# EAGLE board 1tm32 (EAGLE 9.6.2)
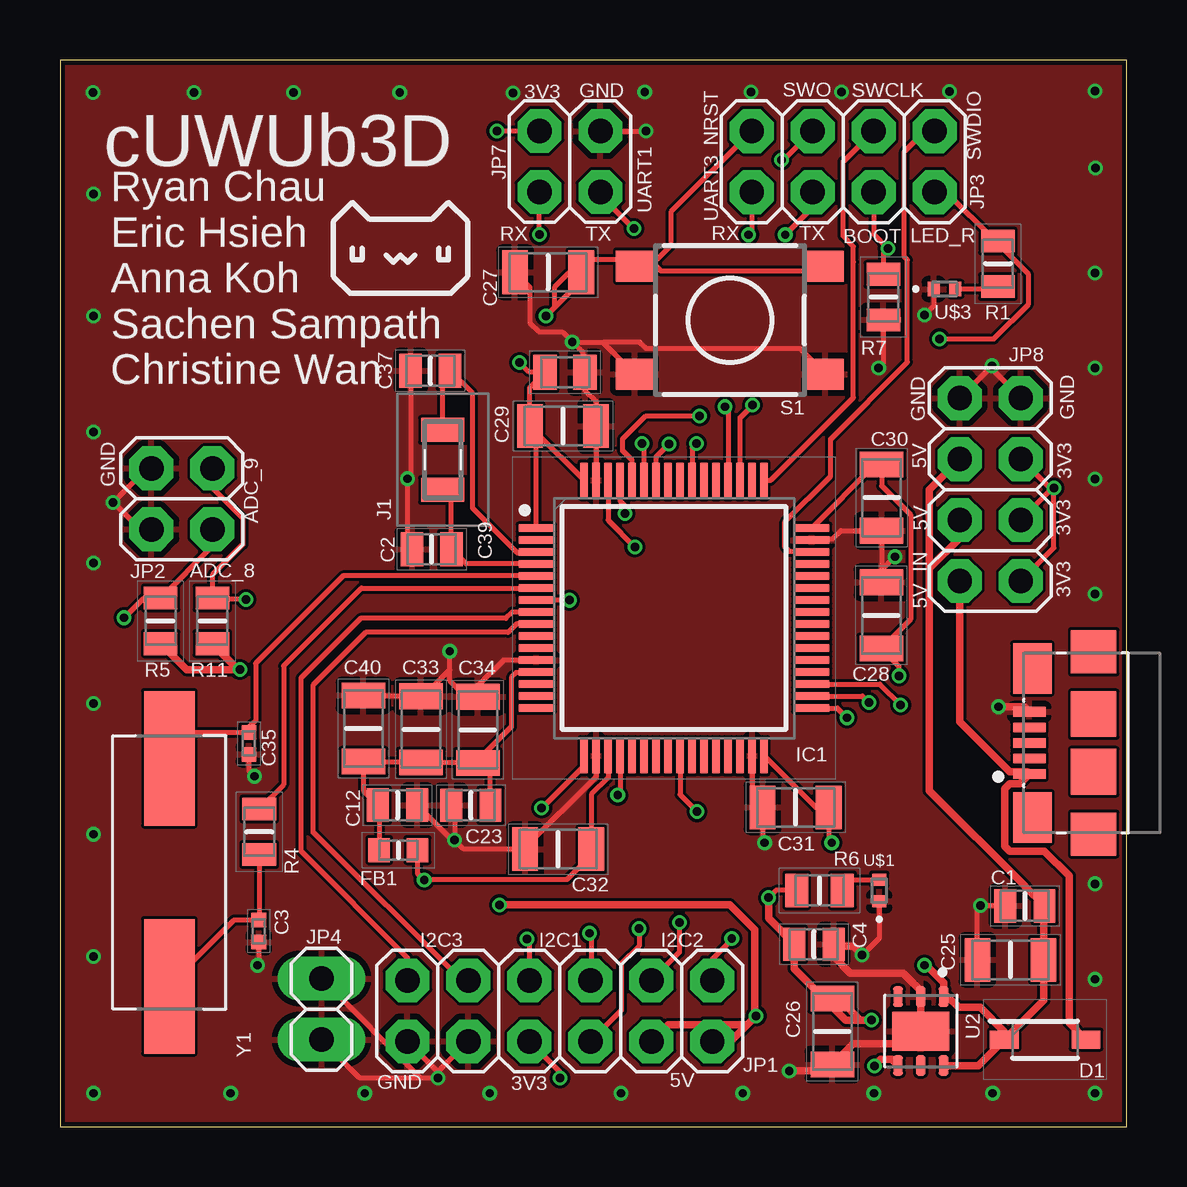
[diagram p0: board, top side]
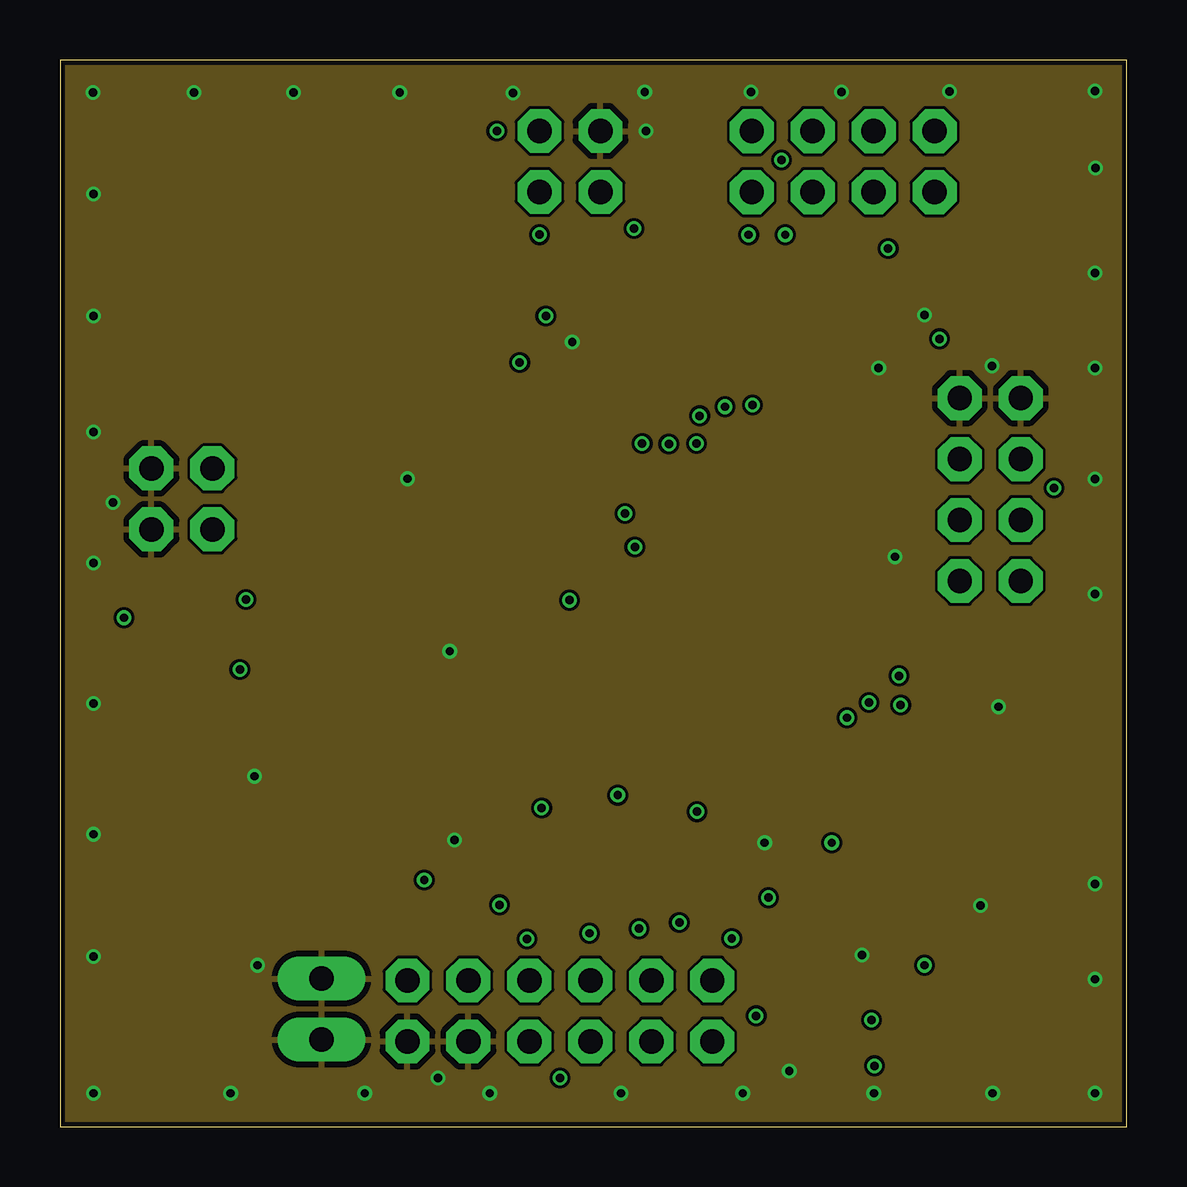
[diagram p1: board, inner layer Route2]
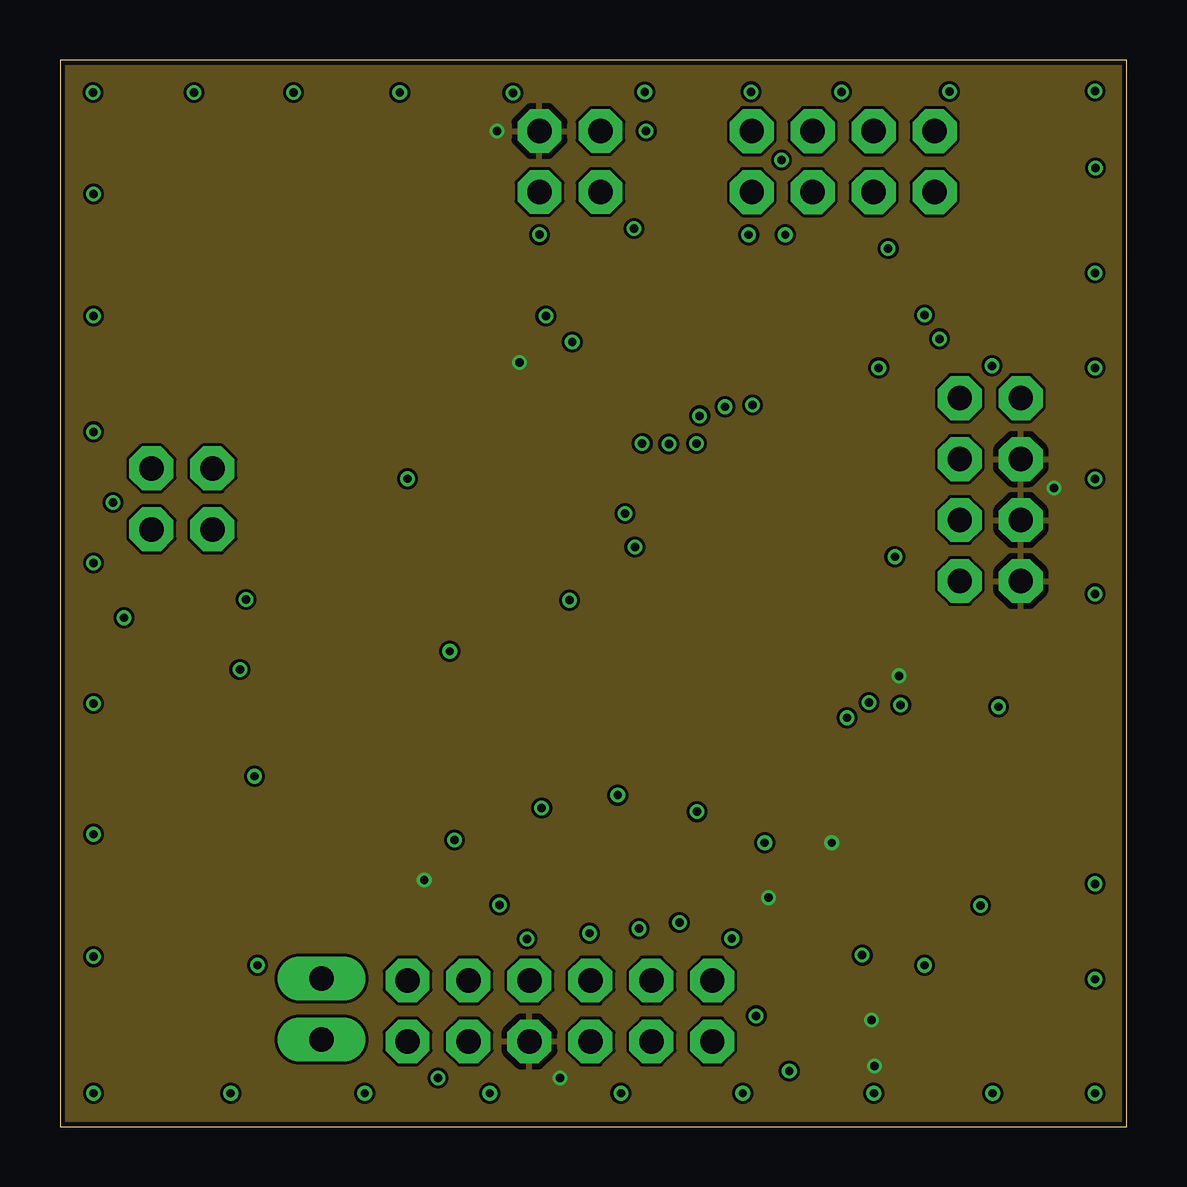
[diagram p2: board, inner layer Route15]
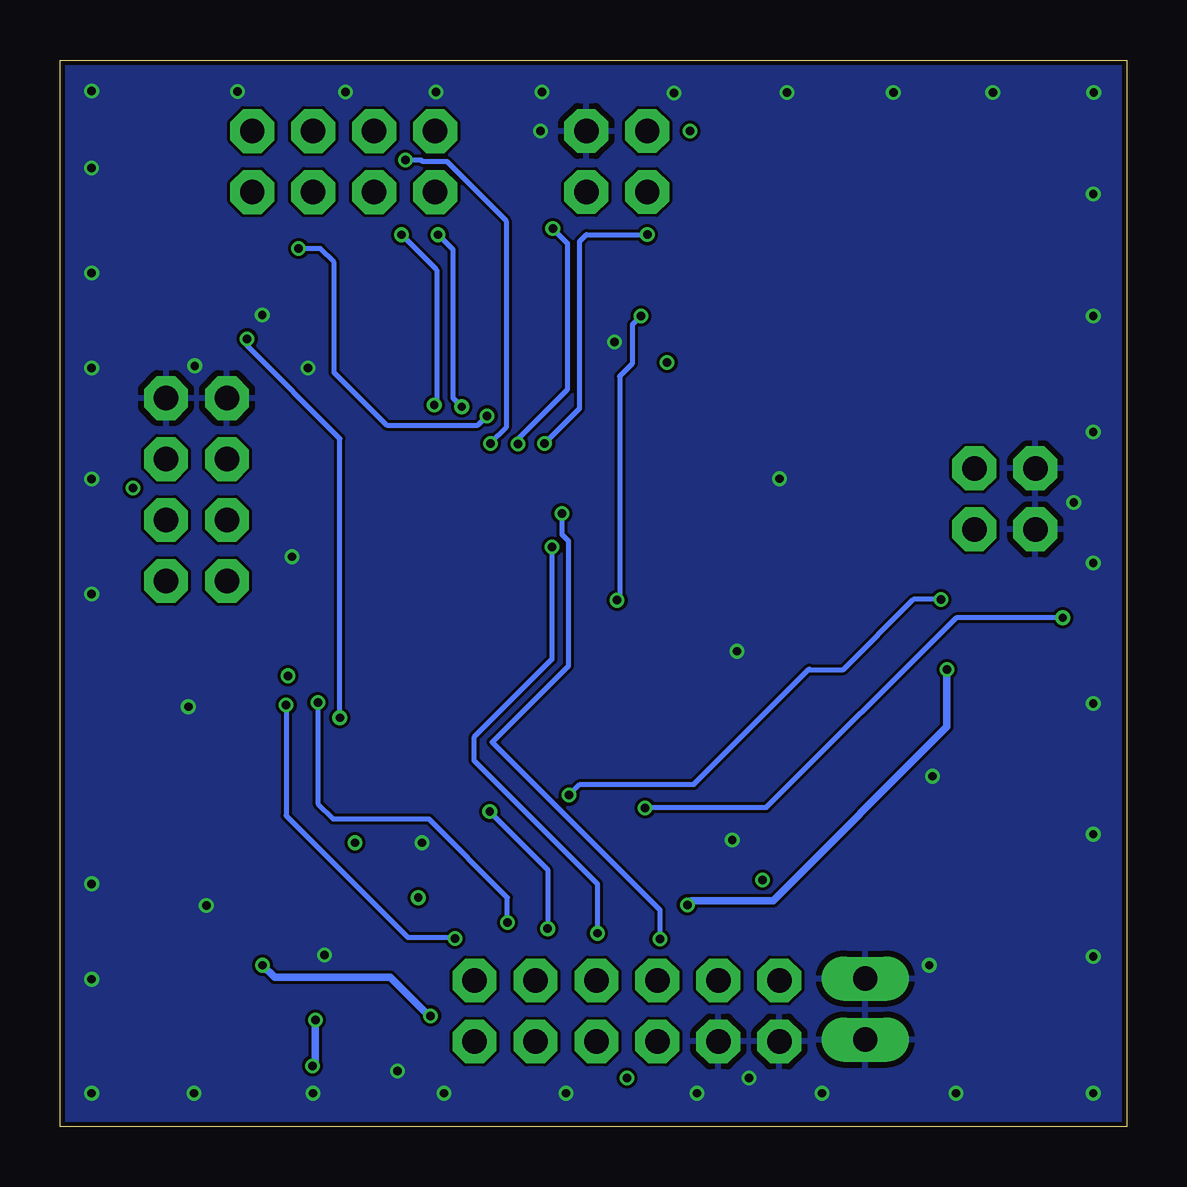
[diagram p3: board, bottom side, seen from below]

Size 44.45 x 44.45 mm. Coordinates in mm from the lower left corner, seen from the top.
Outline: 0,0 44.45,0 44.45,44.45 0,44.45 0,0
Copper layers (1+2*15+16): Top 0.035mm / dielectric 0.2mm / Route2 0.0175mm / dielectric 1.065mm / Route15 0.0175mm / dielectric 0.2mm / Bottom 0.035mm
Design rules "jlcpcb-4layers": minimum track width 3.5mil, minimum drill 0.2mm, track to track 5mil, track to pad 0.2mm, pad to pad 5mil, via to via 0.5mm, smd to smd 5mil, copper to edge 0.2mm, drill to drill 6mil, minimum pad ring 10mil, minimum via ring 0.13mm, stop-mask expansion 0.05mm, vias tented up to drill 16mil, thermal gap 10mil

## Footprints (pad centres in the part's own frame; a part is rotated, then mirrored left to right if it is on the bottom)
CAPC2012X95N = smd 0.91 x 1.39: 1 -0.82,0; 2 0.82,0
CAPC2012X100N = smd 0.94 x 1.43: 1 -0.82,0; 2 0.82,0
CAPC1005X55N = smd 0.6 x 0.62: 1 -0.46,0; 2 0.46,0
CAPC3216X180N = smd 1.07 x 1.82: 1 -1.38,0; 2 1.38,0
CAPC2012X145N = smd 0.97 x 1.47: 1 -0.83,0; 2 0.83,0
1N5819HW-7-F_SOD3716X145N = smd 1.2 x 0.75: 1 -1.7,0; 2 1.7,0
BEADC1608X95N = smd 0.9 x 1: 1 -0.8,0; 2 0.8,0
QFP50P1200X1200X160-64N = smd 1.475 x 0.3: 1 -5.738,3.75; 2 -5.738,3.25; 3 -5.738,2.75; 4 -5.738,2.25; 5 -5.738,1.75; 6 -5.738,1.25; 7 -5.738,0.75; 8 -5.738,0.25; 9 -5.738,-0.25; 10 -5.738,-0.75; 11 -5.738,-1.25; 12 -5.738,-1.75; 13 -5.738,-2.25; 14 -5.738,-2.75; 15 -5.738,-3.25; 16 -5.738,-3.75; 33 5.738,-3.75; 34 5.738,-3.25; 35 5.738,-2.75; 36 5.738,-2.25; 37 5.738,-1.75; 38 5.738,-1.25; 39 5.738,-0.75; 40 5.738,-0.25; 41 5.738,0.25; 42 5.738,0.75; 43 5.738,1.25; 44 5.738,1.75; 45 5.738,2.25; 46 5.738,2.75; 47 5.738,3.25; 48 5.738,3.75 | smd 0.3 x 1.475: 17 -3.75,-5.738; 18 -3.25,-5.738; 19 -2.75,-5.738; 20 -2.25,-5.738; 21 -1.75,-5.738; 22 -1.25,-5.738; 23 -0.75,-5.738; 24 -0.25,-5.738; 25 0.25,-5.738; 26 0.75,-5.738; 27 1.25,-5.738; 28 1.75,-5.738; 29 2.25,-5.738; 30 2.75,-5.738; 31 3.25,-5.738; 32 3.75,-5.738; 49 3.75,5.738; 50 3.25,5.738; 51 2.75,5.738; 52 2.25,5.738; 53 1.75,5.738; 54 1.25,5.738; 55 0.75,5.738; 56 0.25,5.738; 57 -0.25,5.738; 58 -0.75,5.738; 59 -1.25,5.738; 60 -1.75,5.738; 61 -2.25,5.738; 62 -2.75,5.738; 63 -3.25,5.738; 64 -3.75,5.738
DST310S_32.768KHZ_DST310S32768KHZ = smd 1 x 1.8: 1 -1.25,0; 2 1.25,0
AMPHENOL_10118192-0001LF = smd 0.4 x 1.35: 1 -1.3,0; 2 -0.65,0; 3 0,0; 4 0.65,0; 5 1.3,0 | smd 2.1 x 1.6: SH1 -3.1,-0.125; SH2 3.1,-0.125 | smd 1.8 x 1.9: SH3 -3.8,-2.675; SH6 3.8,-2.675 | smd 1.9 x 1.9: SH4 -1.2,-2.675; SH5 1.2,-2.675
2X06 = drill 1.016 octagon: 1 -6.35,-1.27; 2 -6.35,1.27; 3 -3.81,-1.27; 4 -3.81,1.27; 5 -1.27,-1.27; 6 -1.27,1.27; 7 1.27,-1.27; 8 1.27,1.27; 9 3.81,-1.27; 10 3.81,1.27; 11 6.35,-1.27; 12 6.35,1.27
2X02 = drill 1.016 octagon: 1 -1.27,-1.27; 2 -1.27,1.27; 3 1.27,-1.27; 4 1.27,1.27
2X04 = drill 1.016 octagon: 1 -3.81,-1.27; 2 -3.81,1.27; 3 -1.27,-1.27; 4 -1.27,1.27; 5 1.27,-1.27; 6 1.27,1.27; 7 3.81,-1.27; 8 3.81,1.27
1X02 = drill 1.016 long: 1 -1.27,0; 2 1.27,0
RESC2012X60N = smd 0.95 x 1.4: 1 -0.95,0; 2 0.95,0
SWITCH-TACT_DTSM-6 = smd 1.55 x 1.3: 1 -3.975,2.25; 2 3.975,2.25; 3 -3.975,-2.25; 4 3.975,-2.25
SON95P300X300X100-7N = smd 0.84 x 0.4: 1 -1.435,0.95; 2 -1.435,0; 3 -1.435,-0.95; 4 1.435,-0.95; 5 1.435,0; 6 1.435,0.95 | smd 1.625 x 2.365: 7 0,0
LED_SML-P11UTT86R = smd 0.5 x 0.6: A 0.45,0; C -0.45,0
XTAL_ABLS-8.000MHZ-B2-T = smd 5.6 x 2.1: 1 -4.75,0; 2 4.75,0

## Placement (x,y rotation side)
C1  1u  [CAPC2012X95N]  40.2,9.2 0 top
C2  4.7p  [CAPC2012X100N]  15.49,24.06 180 top
C3  20p  [CAPC1005X55N]  8.28,8.15 270 top
C4  1u  [CAPC2012X95N]  31.42,7.61 180 top
C12  1u  [CAPC2012X95N]  14.07,13.4 0 top
C23  1u  [CAPC2012X95N]  17.12,13.4 180 top
C25  100n  [CAPC3216X180N]  39.6,6.96 0 top
C26  100n  [CAPC3216X180N]  32.18,3.97 90 top
C27  100n  [CAPC3216X180N]  20.34,35.61 0 top
C28  100n  [CAPC3216X180N]  34.22,21.31 90 top
C29  100n  [CAPC3216X180N]  20.96,29.2 0 top
C30  100n  [CAPC3216X180N]  34.23,26.22 270 top
C31  100n  [CAPC3216X180N]  30.65,13.31 180 top
C32  100n  [CAPC3216X180N]  20.76,11.57 180 top
C33  100n  [CAPC3216X180N]  15.04,16.56 90 top
C34  100n  [CAPC3216X180N]  17.41,16.54 90 top
C35  20p  [CAPC1005X55N]  7.87,15.98 270 top
C37  4.7p  [CAPC2012X100N]  15.43,31.5 180 top
C39  4.7u  [CAPC2012X145N]  21.04,31.44 0 top
C40  10n  [CAPC3216X180N]  12.64,16.6 90 top
D1  1N5819HW-7-F_1N5819HW-7-F  [1N5819HW-7-F_SOD3716X145N]  41.05,3.63 0 top
FB1  BK1608HS601-T  [BEADC1608X95N]  14.09,11.53 0 top
IC1  STM32L412RBT6  [QFP50P1200X1200X160-64N]  25.58,21.2 0 top
J1  DST310S_32.768KHZ  [DST310S_32.768KHZ_DST310S32768KHZ]  15.95,27.79 270 top
J2  10118192-0001LF  [AMPHENOL_10118192-0001LF]  40.39,15.99 90 top
JP1  [2X06]  20.83,4.83 0 top
JP2  [2X02]  5.08,26.16 270 top
JP3  [2X04]  32.63,40.22 0 top
JP4  [1X02]  10.9,4.9 90 top
JP7  [2X02]  21.25,40.22 0 top
JP8  [2X04]  38.76,26.55 270 top
R1  1K  [RESC2012X60N]  39.08,35.96 90 top
R4  220  [RESC2012X60N]  8.3,12.29 270 top
R5  10K  [RESC2012X60N]  4.19,21.08 90 top
R6  1K  [RESC2012X60N]  31.65,9.85 180 top
R7  1K  [RESC2012X60N]  34.31,34.57 270 top
R11  10K  [RESC2012X60N]  6.35,21.08 90 top
S1  SWITCH-TACT_DTSM-6  [SWITCH-TACT_DTSM-6]  27.91,33.61 0 top
U2  LD39050PU33R  [SON95P300X300X100-7N]  35.87,3.99 270 top
U$1  LED_R  [LED_SML-P11UTT86R]  34.14,9.85 90 top
U$3  LED_R  [LED_SML-P11UTT86R]  36.86,34.91 0 top
Y1  8MHz  [XTAL_ABLS-8.000MHZ-B2-T]  4.56,10.6 90 top

## Library data of the parts
C1 C4 C12 C23 = GRM219R61H105KA73D(1u); DESCRIPTION: MURATA - GRM219R61H105KA73D - CAP, MLCC, X5R, 1UF, 50V, 0805; HEIGHT: 0.95mm; MANUFACTURER_NAME: Murata Electronics; MANUFACTURER_PART_NUMBER: GRM219R61H105KA73D; MOUSER_PART_NUMBER: 81-GRM219R61H105KA3D; MOUSER_PRICE-STOCK: https://www.mouser.co.uk/ProductDetail/Murata-Electronics/GRM219R61H105KA73D?qs=O5cugoO6nweiD1nCQ5vS9w%3D%3D
C2 C37 = GQM2195C2E4R7BB12D(4_7p); DESCRIPTION: Capacitor GQM21 L=2.0mm W=1.25mm T=0.85mm; HEIGHT: 1mm; MANUFACTURER_NAME: Murata Electronics; MANUFACTURER_PART_NUMBER: GQM2195C2E4R7BB12D; MOUSER_PART_NUMBER: 81-GQM2195C2E4R7BB2D; MOUSER_PRICE-STOCK: https://www.mouser.co.uk/ProductDetail/Murata-Electronics/GQM2195C2E4R7BB12D?qs=0JbGSuRBwBOIE8NOw5EJ%2FA%3D%3D
C3 C35 = CC0402KPX7R7BB104(0402cap_foot); DESCRIPTION: Multilayer Ceramic Capacitors MLCC - SMD/SMT 16 V 0.1uF X7R 0402 10%; HEIGHT: 0.55mm; MANUFACTURER_NAME: YAGEO; MANUFACTURER_PART_NUMBER: CC0402KPX7R7BB104; MOUSER_PART_NUMBER: 603-CC402KPX7R7BB104; MOUSER_PRICE-STOCK: https://www.mouser.co.uk/ProductDetail/YAGEO/CC0402KPX7R7BB104?qs=7s%252B3O6pAiyDFg2%2FesnFI7w%3D%3D
C25-C34 = GRT31C5C2A104JA12L(0_1u); DESCRIPTION: Multilayer Ceramic Capacitors MLCC - SMD/SMT; HEIGHT: 1.8mm; MANUFACTURER_NAME: Murata Electronics; MANUFACTURER_PART_NUMBER: GRT31C5C2A104JA12L; MOUSER_PART_NUMBER: 81-GRT31C5C2A104JA2L; MOUSER_PRICE-STOCK: https://www.mouser.co.uk/ProductDetail/Murata-Electronics/GRT31C5C2A104JA12L?qs=rI7uf1IzohSpYGEFBFd58g%3D%3D
C39 = GRT21BC71H475KE13L(4_7u); DESCRIPTION: GRT21BC71H475KE13_ (0805, X7S:EIA, 4.7uF, DC50V); HEIGHT: 1.45mm; MANUFACTURER_NAME: Murata Electronics; MANUFACTURER_PART_NUMBER: GRT21BC71H475KE13L; MOUSER_PART_NUMBER: 81-GRT21BC71H475KE3L; MOUSER_PRICE-STOCK: https://www.mouser.co.uk/ProductDetail/Murata-Electronics/GRT21BC71H475KE13L?qs=rI7uf1IzohQrtwc9u30k7A%3D%3D
C40 = GRM31CR73A103KW03L(0_01u); DESCRIPTION: Murata 3216 GRM 10000pF Ceramic Multilayer Capacitor, 1000 V dc, +125C, X7R Dielectric, +/-10%; HEIGHT: 1.8mm; MANUFACTURER_NAME: Murata Electronics; MANUFACTURER_PART_NUMBER: GRM31CR73A103KW03L; MOUSER_PART_NUMBER: 81-GRM31CR73A103KW3L; MOUSER_PRICE-STOCK: https://www.mouser.co.uk/ProductDetail/Murata-Electronics/GRM31CR73A103KW03L?qs=hNud%2FORuBR1TymPCs4fJcA%3D%3D
D1 = ce-capstone-2022; ARROW_PART_NUMBER: 1N5819HW-7-F; ARROW_PRICE-STOCK: https://www.arrow.com/en/products/1n5819hw-7-f/diodes-incorporated; DESCRIPTION: Diode Schottky 1A 40V SOD123 Diodes Inc 1N5819HW-7-F, SMT Schottky Diode, 40V 1A, 2-Pin SOD-123; HEIGHT: 1.45mm; MANUFACTURER_NAME: Diodes Inc.; MANUFACTURER_PART_NUMBER: 1N5819HW-7-F; MOUSER_PART_NUMBER: 621-1N5819HW-F; MOUSER_PRICE-STOCK: https://www.mouser.co.uk/ProductDetail/Diodes-Incorporated/1N5819HW-7-F?qs=NQ47qNm99eDyWTEd07miYA%3D%3D
FB1 = ce-capstone; DESCRIPTION: Ferrite Chip Bead(Lead Free); HEIGHT: 0.95mm; MANUFACTURER_NAME: Taiyo Yuden; MANUFACTURER_PART_NUMBER: BK1608HS601-T
IC1 = STM32L412RBT6P; DESCRIPTION: ARM Microcontrollers - MCU; HEIGHT: 1.6mm; MANUFACTURER_NAME: STMicroelectronics; MANUFACTURER_PART_NUMBER: STM32L412RBT6P; MOUSER_PART_NUMBER: 511-STM32L412RBT6P; MOUSER_PRICE-STOCK: https://www.mouser.co.uk/ProductDetail/STMicroelectronics/STM32L412RBT6P?qs=l7cgNqFNU1hh%252BU1wOZs5Xg%3D%3D
J1 = ce-capstone-2022; DESCRIPTION: SMD Crystal Resonators 32.768KHz +/-20ppm SMD-3215_2P RoHS; HEIGHT: 0.85mm; MANUFACTURER_NAME: KDS Daishinku; MANUFACTURER_PART_NUMBER: DST310S 32.768KHz
J2 = ce-capstone; AVAILABILITY: Unavailable; DESCRIPTION: USB - micro B USB 2.0 Receptacle Connector 5 Position Surface Mount, Right Angle; MF: Amphenol ICC; MP: 10118192-0001LF; PACKAGE: None; PRICE: None
JP1-JP4 JP7 JP8 = pinhead
R1 R6 R7 = RC0805FR-131KL; DESCRIPTION: Thick Film Resistors - SMD 1 kOhms 250 mW 0805 1%; HEIGHT: 0.6mm; MANUFACTURER_NAME: KEMET; MANUFACTURER_PART_NUMBER: RC0805FR-131KL; MOUSER_PART_NUMBER: 603-RC0805FR-131KL; MOUSER_PRICE-STOCK: https://www.mouser.co.uk/ProductDetail/YAGEO/RC0805FR-131KL?qs=m6lXFsvg5e0qJLgmV7HC3Q%3D%3D
R4 = RC0805FR-10220RL; DESCRIPTION: Thick Film Resistors - SMD 220 OHM 1%; HEIGHT: 0.6mm; MANUFACTURER_NAME: KEMET; MANUFACTURER_PART_NUMBER: RC0805FR-10220RL; MOUSER_PART_NUMBER: 603-RC0805FR-10220RL; MOUSER_PRICE-STOCK: https://www.mouser.co.uk/ProductDetail/YAGEO/RC0805FR-10220RL?qs=m6lXFsvg5e0JpfeoSKi9%252BQ%3D%3D
R5 R11 = RC0805JR-0710KL; DESCRIPTION: YAGEO - RC0805JR-0710KL - SMD Chip Resistor, 0805 [2012 Metric], 10 kohm, RC Series, 150 V, Thick Film, 125 mW; HEIGHT: 0.6mm; MANUFACTURER_NAME: KEMET; MANUFACTURER_PART_NUMBER: RC0805JR-0710KL; MOUSER_PART_NUMBER: 603-RC0805JR-0710KL; MOUSER_PRICE-STOCK: https://www.mouser.co.uk/ProductDetail/YAGEO/RC0805JR-0710KL?qs=ZFGQJeMQzF5q%2Fp77vM%2FrVQ%3D%3D
S1 = ce-capstone-2022
U2 = ce-capstone; AVAILABILITY: Unavailable; DESCRIPTION: Linear Voltage Regulator IC 1 Output 500mA 6-DFN _3x3_; MF: STMicroelectronics; MP: LD39050PU33R; PACKAGE: DFN-6 STMicroelectronics; PRICE: None
U$1 U$3 = ce-capstone; AVAILABILITY: Unavailable; DESCRIPTION: Red 630nm LED Indication - Discrete 2V 0402 _1006 Metric_; MF: Rohm; MP: SML-P12VTT86; PACKAGE: 0402 Rohm; PRICE: None
Y1 = ce-capstone; AVAILABILITY: Unavailable; DESCRIPTION: 8MHz ±20ppm Crystal 18pF 80 Ohms HC-49/US; MF: Abracon LLC; MP: ABLS-8.000MHZ-B2; PACKAGE: HC-49/US Abracon LLC; PRICE: None

## Nets
3V3: C4.2 C26.2 C28.1 C29.1 C30.1 C31.1 C32.1 C39.1 FB1.2 IC1.1 IC1.19 IC1.32 IC1.48 IC1.64 JP1.5 JP7.2 JP8.4 JP8.6 JP8.8 R6.2 U2.4
5V: C1.2 C25.2 D1.1 JP1.9 JP1.11 JP8.3 JP8.5 R5.1 R11.1 U2.1 U2.6
5V_IN: D1.2 J2.1 JP8.7
ADC1_IN9: IC1.20 JP2.2 R11.2
ADC2_IN8: IC1.17 JP2.4 R5.2
BOOT0: IC1.60 JP3.5 R7.1
GND: C1.1 C2.2 C3.2 C4.1 C12.2 C23.2 C25.1 C26.1 C27.1 C28.2 C29.2 C30.2 C31.2 C32.2 C33.2 C34.2 C35.2 C37.2 C39.2 C40.2 IC1.12 IC1.18 IC1.31 IC1.47 IC1.63 J2.5 JP1.1 JP1.3 JP2.1 JP2.3 JP4.1 JP4.2 JP7.4 JP8.1 JP8.2 R7.2 S1.3 S1.4 U2.2 U2.7 U$1.C U$3.C
I2C1_SCL: IC1.61 JP1.6
I2C1_SDA: IC1.62 JP1.8
I2C2_SCL: IC1.34 JP1.10
I2C2_SDA: IC1.35 JP1.12
I2C3_SCL: IC1.8 JP1.2
I2C3_SDA: IC1.9 JP1.4
LED_R: IC1.33 JP3.7 R1.2
N$2: R1.1 U$3.A
N$3: C3.1 R4.2 Y1.1
N$5: R6.1 U$1.A
NRST: C27.2 IC1.7 JP3.2 S1.1 S1.2
PC4: IC1.24
PC5: IC1.25 JP1.7
PC14-OSC32-IN: C37.1 IC1.3 J1.1
PC15-OSC32-OUT: C2.1 IC1.4 J1.2
PH0-OSC-IN: C35.1 IC1.5 Y1.2
PH1-OSC-OUT: IC1.6 R4.1
SWCLK: IC1.49 JP3.6
SWDIO: IC1.46 JP3.8
SWO: IC1.55 JP3.4
TIM1_CH1: IC1.41
TIM1_CH2: IC1.42
TIM1_CH3: IC1.43
TIM1_CH4: IC1.44
TIM2_CH1: IC1.14
TIM2_CH2: IC1.15
TIM2_CH3: IC1.29
TIM2_CH4: IC1.30
TIM15_CH1: IC1.16
TIM15_CH2: IC1.36
TIM16_CH1: IC1.22
USART1_RX: IC1.59 JP7.1
USART1_TX: IC1.58 JP7.3
USART3_RX: IC1.52 JP3.1
USART3_TX: IC1.51 JP3.3
VDDA/VREF+: C12.1 C23.1 C33.1 C34.1 C40.1 FB1.1 IC1.13

## Tracks (layer width: path | path; a pad name or v marks a point on that pad's centre or on a via)
3V3  (via drill 0.35)
  Top 0.203: IC1.19 22.83,14.55 22.14,13.85 C32.1 22.14,11.31 21.12,10.3 15.19,10.3 v15.18,10.28 14.89,10.56 FB1.2 | R6.2 29.82,9.85 v29.52,9.55 | IC1.64 19.84,28.92 | v19.15,31.85 19.56,31.44 C39.1 19.55,30.78 19.55,29.17 C29.1 19.84,28.92 | IC1.1 19.84,28.92 | IC1.32 31.48,13.31 C31.1 32.03,11.96 v32.16,11.84 | IC1.48 33.97,27.6 C30.1 34.23,26.71 35.45,25.5 35.45,21.15 C28.1 34.95,19.2 v34.95,18.79 | JP7.2 v18.2,41.49 | JP1.5 20.83,2.29 v20.83,2.03 | JP8.4 41.23,26.62 v41.41,26.62 | JP8.6 41.37,26.62 v41.41,26.62 | JP8.8 41.41,24.12 v41.41,26.62
  Top 0.305: v29.52,9.55 29.52,8.68 C4.2 30.6,6.58 32.74,4.45 v33.81,4.45 33.35,4.45 32.57,5.22 32.44,5.35 C26.2 | U2.4 34.66,2.81 34.2,2.81 v33.93,2.54
  Bottom 0.305: v33.93,2.54 33.81,2.67 v33.81,4.45
  pour Route15: 0,44.45 44.45,44.45 44.45,0 0,0
5V  (via drill 0.35)
  Top 0.305: v36.02,6.73 36.09,6.73 36.82,6 U2.1 37,5.42 37.44,4.97 38.34,4.97 39.35,3.97 D1.1 | v29.01,4.62 | v29.01,4.62 28.64,4.25 | 28.64,4.25 27.94,3.56 JP1.11 | 28.64,4.25 25.34,4.25 JP1.9 | R11.1 7.43,19.05 v7.49,19.05 5.27,19.05 R5.1 | D1.1 38.27,2.55 U2.6 | D1.1 40.98,5.27 C25.2 40.98,9.16 C1.2 40.19,10.03 40.19,10.04 36.23,14.01 36.23,23.27 | JP8.5 37.49,24.53 36.23,23.27 | 36.23,23.27 36.21,23.25 36.21,26.54 JP8.3 | v29.01,4.62 28.95,4.68 28.95,8.22 27.92,9.25 v18.31,9.25
  Bottom 0.305: v36.02,6.73 35.51,6.22 30.68,6.22 29.08,4.62 v29.01,4.62 | v18.31,9.25 18.13,9.43 14.73,9.43 7.49,16.66 v7.49,19.05
5V_IN
  Top 0.305: D1.2 42.05,4.33 42.05,10.46 41.02,11.49 39.57,11.49 39.36,11.7 39.36,14.09 39.57,14.3 39.99,14.3 J2.1 40.29,14.79 39.57,14.79 37.49,16.87 JP8.7
ADC1_IN9  (via drill 0.35)
  Top 0.203: IC1.20 23.33,13.91 v23.24,13.82 | JP2.2 6.35,26.63 7.62,25.36 7.62,24.27 6.35,23 R11.2 6.41,21.97 v7.75,21.97
  Bottom 0.203: v23.24,13.82 22.79,14.27 18.04,14.27 13.23,19.07 13.2,19.05 11.81,19.05 8.89,21.97 v7.75,21.97
ADC2_IN8  (via drill 0.35)
  Top 0.203: IC1.17 21.83,15.05 v20.07,13.28 | JP2.4 6.35,24.19 R5.2 3.49,22.03 v2.67,21.21
  Bottom 0.203: v20.07,13.28 20.04,13.31 15.01,13.31 7.11,21.21 v2.67,21.21
BOOT0  (via drill 0.35)
  Top 0.203: v26.65,29.62 24.41,29.62 23.45,28.66 23.45,28.16 23.83,27.77 IC1.60 | R7.1 34.31,36.4 v34.51,36.6 33.9,37.2 JP3.5
  Bottom 0.203: v26.65,29.62 27.04,29.24 30.84,29.24 33.02,31.42 33.02,36.02 33.6,36.6 v34.51,36.6
GND  (via drill 0.35)
  Top 0.203: U$1.C 34.14,7.86 v33.42,7.15 | IC1.63 C29.2 22.34,30.21 21.87,30.68 C39.2 21.77,31.54 21.77,32.27 v21.34,32.7 | IC1.12 18.48,19.45 17.41,18.38 C34.2 16.91,17.92 16.24,18.59 16.24,19.04 | C40.2 12.68,17.94 C33.2 15.14,17.94 16.24,19.04 | C23.2 16.44,13.54 v16.44,11.96 | IC1.18 22.33,14.6 19.38,11.64 C32.2 16.83,11.57 v16.44,11.96 | C12.2 16.33,11.96 v16.44,11.96 | 16.24,19.04 v16.24,19.81 | C25.1 38.22,9.09 v38.35,9.22 39.36,9.22 C1.1 | IC1.31 28.83,13.75 C31.2 29.27,11.93 v29.36,11.84 | C37.2 14.61,27.13 v14.48,27 14.48,24.25 C2.2 | JP7.4 v24.42,41.49 | JP1.3 15.75,2.29 | JP1.1 15.75,2.29 | 15.75,2.29 v15.75,2.03 | JP2.1 3.62,27.43 v2.21,26.02 3.34,24.89 JP2.3 | U$3.C 36.41,34.2 v36.02,33.82 | R7.2 34.31,31.82 v34.11,31.62 | S1.4 30.82,32.43 24.42,32.43 24.16,32.7 22.68,32.7 | v21.34,32.7 22.68,32.7 | C35.2 7.87,14.83 v8.1,14.61 | C3.2 8.28,6.78 v8.23,6.73 | v15.75,2.03 12.5,2.03 JP4.1 | v15.75,2.03 15.04,2.03 JP4.2 | C28.2 34.22,23.18 | JP8.2 38.84,31.56 v38.84,31.71 JP8.1 | C27.1 19.58,34.98 19.58,33.51 19.97,33.12 20.92,33.12 v21.34,32.7 | 22.68,32.7 22.68,32.63 S1.3 | IC1.47 31.37,24.5 32.18,24.5 32.52,24.84 C30.2 34.23,22.7 C28.2 | C28.2 34.22,23.19 v34.78,23.75
  Top 0.305: v30.38,2.33 31.91,2.33 C26.1 33.05,3.46 35.34,3.46 U2.7 U2.2 35.87,5.66 35.81,5.72 35.82,5.72 35.13,6.4 32.94,6.4 32.24,7.1 C4.1 32.33,7.51 33.06,7.51 v33.42,7.15 | J2.5 40.18,17.5 v39.1,17.5
  other vias: 1.4,1.4 7.11,1.4 12.7,1.4 17.91,1.4 23.37,1.4 28.45,1.4 33.91,1.4 38.86,1.4 43.13,1.4 43.13,10.12 43.13,6.15 43.13,22.21 43.13,26.99 43.13,31.62 43.13,35.57 43.14,39.95 43.13,43.15 37.06,43.14 32.56,43.12 14.16,43.09 9.73,43.1 5.58,43.09 1.38,43.09 1.4,38.86 1.4,33.78 1.4,28.96 1.4,23.5 1.4,17.64 1.4,12.19 1.4,7.09 18.87,43.07 24.37,43.12 28.79,43.12
  pour Top: 0,44.45 44.45,44.45 44.45,0 0,0
  pour Bottom: 0,44.45 44.45,44.45 44.45,0 0,0
  pour Route2: 0,44.45 44.45,44.45 44.45,0 0,0
I2C1_SCL  (via drill 0.35)
  Top 0.203: IC1.61 23.33,26.09 23.54,25.88 v23.54,25.55 | v19.46,7.82 19.56,7.72 JP1.6
  Bottom 0.203: v23.54,25.55 23.54,24.69 23.27,24.42 23.27,19.2 26.44,16.03 19.46,9.04 v19.46,7.82
I2C1_SDA  (via drill 0.35)
  Top 0.203: IC1.62 22.83,25.27 v23.95,24.16 | JP1.8 22.14,6.14 22.14,7.98 v22.06,8.06
  Bottom 0.203: v23.95,24.16 23.95,19.48 27.2,16.23 27.2,15.26 22.06,10.12 v22.06,8.06
I2C2_SCL  (via drill 0.35)
  Top 0.203: IC1.34 33.44,17.95 v33.71,17.68 | v25.81,8.51 25.81,7.26 JP1.10
  Bottom 0.203: v25.81,8.51 25.81,9.55 29.08,12.83 33.07,12.83 33.71,13.46 v33.71,17.68
I2C2_SDA  (via drill 0.35)
  Top 0.203: IC1.35 34.16,18.44 v35.03,17.58 | v27.99,7.85 28.02,7.82 27.18,6.99 JP1.12
  Bottom 0.203: v35.03,17.58 35.03,12.97 29.95,7.89 28.04,7.89 v27.99,7.85
I2C3_SCL
  Top 0.203: IC1.8 18.84,21.45 18.57,21.18 12.52,21.18 10.03,18.69 10.03,11.5 14.48,7.05 JP1.2
I2C3_SDA
  Top 0.203: IC1.9 19.03,20.95 18.67,20.6 12.75,20.6 10.54,18.39 10.54,12.29 16.74,6.1 JP1.4
LED_R  (via drill 0.35)
  Top 0.203: JP3.7 36.93,38.95 38.96,36.91 | 38.96,36.91 R1.2 | IC1.33 32.39,17.45 v32.79,17.04 | v36.65,32.83 38.91,32.83 40.36,34.28 40.36,35.51 38.96,36.91
  Bottom 0.203: v32.79,17.04 32.79,28.68 36.65,32.54 v36.65,32.83
N$2
  Top 0.203: R1.1 38.97,34.91 U$3.A
N$3
  Top 0.203: Y1.1 4.56,5.93 7.24,8.61 C3.1 8.3,8.63 R4.2
N$5
  Top 0.203: R6.1 33.05,10.29 U$1.A
NRST  (via drill 0.35)
  Top 0.203: IC1.7 v21.23,21.94 | 23.65,36.16 21.77,36.16 20.62,35 20.62,34.16 v20.24,33.78 21.72,35.26 C27.2 | 23.65,36.16 24.55,36.16 | 24.55,36.16 24.89,36.16 25.45,36.71 25.45,38.12 JP3.2 | S1.2 31.69,35.66 25.05,35.66 24.55,36.16 | S1.1 23.65,36.16
  Bottom 0.203: v20.24,33.78 20.6,33.43 20.6,31.8 21.13,31.27 21.13,22.04 v21.23,21.94
PC5  (via drill 0.35)
  Top 0.203: v24.13,8.26 24.13,7.53 23.39,6.8 23.39,4.85 JP1.7 | IC1.25 25.83,13.84 v26.54,13.13
  Bottom 0.203: v26.54,13.13 24.13,10.72 v24.13,8.26
PC14-OSC32-IN
  Top 0.203: IC1.3 19.81,23.92 19.05,23.92 17.2,25.77 17.2,30.56 C37.1 15.95,31.21 J1.1
PC15-OSC32-OUT
  Top 0.203: IC1.4 16.92,23.45 C2.1 16.31,26.18 J1.2
PH0-OSC-IN
  Top 0.203: IC1.5 19.84,22.95 11.8,22.95 8.15,19.31 8.15,16.92 7.87,16.64 C35.1 5.64,16.44 Y1.2
PH1-OSC-OUT
  Top 0.203: R4.1 9.32,14.26 9.32,19.21 12.55,22.45 IC1.6
SWCLK
  Top 0.203: JP3.6 32.63,40.22 32.63,37.12 33.06,36.69 33.06,36.03 33.06,30.38 29.61,26.93 IC1.49
SWDIO
  Top 0.203: IC1.46 31.32,23.96 31.32,23.97 30.4,23.97 30.2,24.17 30.2,25.2 32.11,27.11 32.11,28.65 35.31,31.86 35.31,36.12 35.18,36.25 35.18,40.63 36.03,41.49 JP3.8
SWO  (via drill 0.35)
  Top 0.203: JP3.4 30.16,40.29 v30.06,40.29 | v26.52,28.47 26.33,28.29 IC1.55
  Bottom 0.203: v30.06,40.29 29.41,40.29 29.35,40.23 28.33,40.23 25.86,37.75 25.86,29.13 v26.52,28.47
USART1_RX  (via drill 0.35)
  Top 0.203: IC1.59 24.33,28.4 v24.26,28.47 | v19.98,37.17 JP7.1
  Bottom 0.203: v24.26,28.47 22.8,29.93 22.8,36.89 22.52,37.17 v19.98,37.17
USART1_TX  (via drill 0.35)
  Top 0.203: IC1.58 24.83,27.91 v25.37,28.45 | v23.92,37.43 22.52,38.82 JP7.3
  Bottom 0.203: v25.37,28.45 25.37,28.65 23.31,30.71 23.31,36.82 v23.92,37.43
USART3_RX  (via drill 0.35)
  Top 0.203: JP3.1 28.82,37.3 v28.69,37.17 | v27.71,30 27.84,29.87 IC1.52
  Bottom 0.203: v28.69,37.17 28.08,36.56 28.08,30.37 v27.71,30
USART3_TX  (via drill 0.35)
  Top 0.203: IC1.51 28.33,29.55 v28.85,30.07 | v30.22,37.17 31.36,38.31 JP3.3
  Bottom 0.203: v28.85,30.07 28.75,30.18 28.75,35.7 v30.22,37.17
VDDA/VREF+
  Top 0.203: IC1.13 19.83,18.93 19,18.93 18.8,18.73 18.8,16.67 17.3,15.16 | 17.3,15.16 C34.1 17.52,15.27 17.94,14.86 C23.1 | 17.3,15.16 15.06,15.16 C33.1 12.68,15.18 C40.1 12.64,14 C12.1 13.29,13.35 FB1.1

## Text on the board
tPlace: 3V3 | GND | SWO | SWCLK | UART1 | NRST | cUWUb3D | SWDIO | UART3 | RX | TX | RX | TX | BOOT | LED_R | Ryan Chau / Eric Hsieh / Anna Koh / Sachen Sampath / Christine Wan | GND | GND | GND | 5V | 3V3 | ADC_9 | 5V | 3V3 | ADC_8 | 5V_IN | 3V3 | I2C3 | I2C1 | I2C2 | GND | 3V3 | 5V